# Allegro board AHC-19-001_Relay_PCB.brd
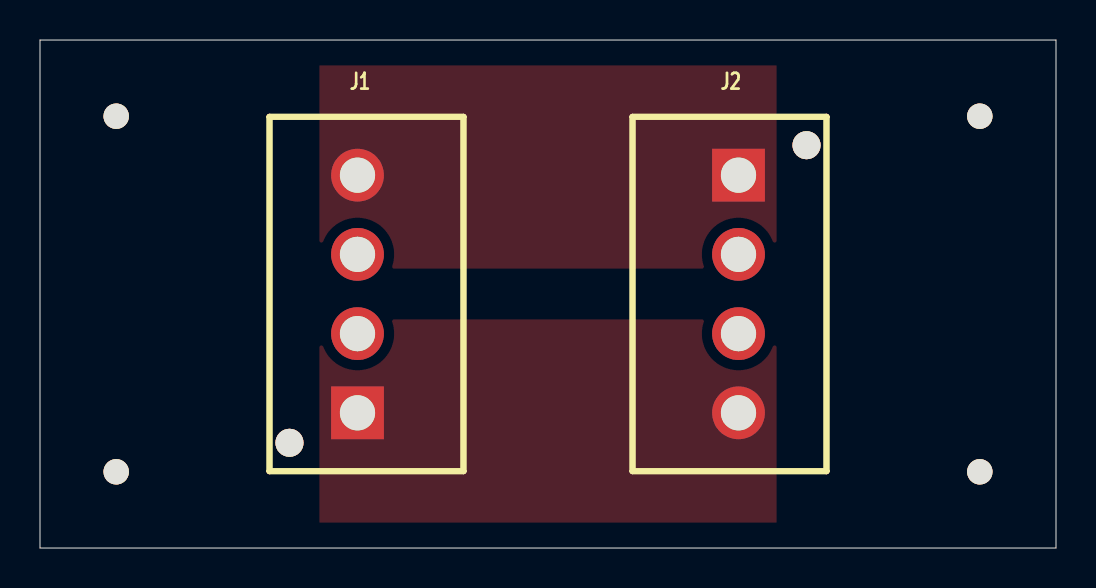
[diagram p0: board, top side]
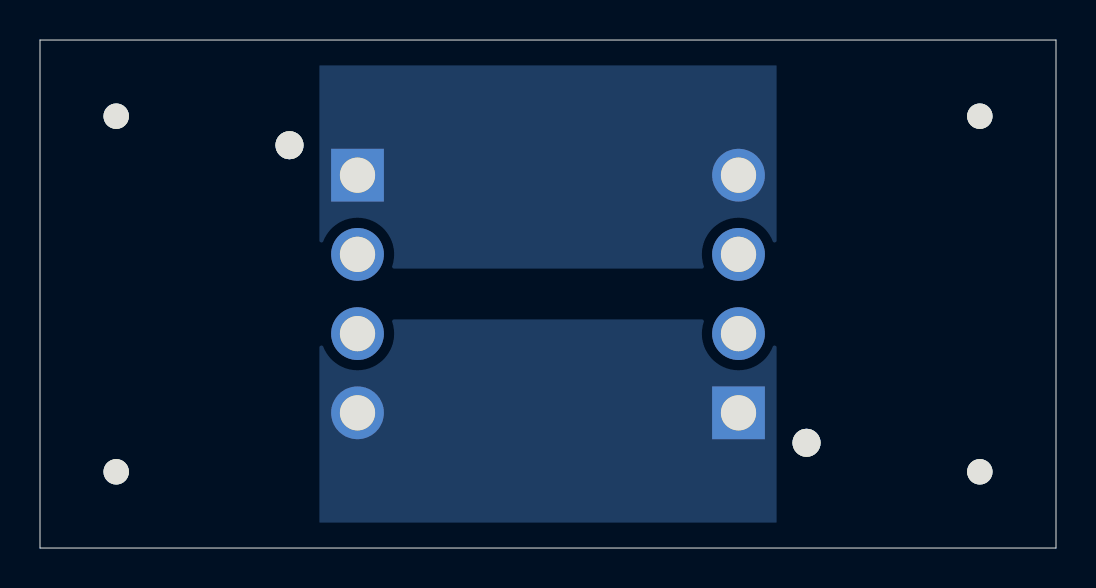
[diagram p1: board, bottom side, seen from below]

Outline 50.8 x 25.4 mm; copper layers: TOP, BOTTOM. Coordinates in mm from the lower left corner of the outline.
Outline path: 0,25.4 0,0 50.8,0 50.8,25.4 0,25.4

## Design rules (mm)
constraint set DEFAULT: min track width 0.152, pair gap 0.152

## Placement (name value [footprint] x y rotation side)
J1  B4P-VH-FB-B  [JST_B4P-VH-FB-B]  16.32 12.7 90 top
J2  B4P-VH-FB-B  [JST_B4P-VH-FB-B]  34.48 12.7 270 top
NOREF  -  []  3.81 3.81 90 top
NOREF#2  -  []  15.87 6.76 0 top
NOREF#3  -  [unnamed#2]  3.81 3.81 0 top
NOREF#4  -  []  -50.8 -127 0 top
NOREF#5  -  [unnamed#2]  3.81 21.59 0 top
NOREF#6  -  []  50.8 0 90 top
NOREF#7  -  [unnamed#2]  46.99 3.81 0 top
NOREF#8  -  [unnamed#2]  46.99 21.59 0 top
NOREF#9  -  []  0 25.4 0 top
NOREF#10  -  []  3.81 21.59 0 top

## Library data of the parts
J1 J2 = CON_4

## Footprints (pads in the part's own frame, mm; a bottom-side part is the same pattern mirrored in y, then rotated)
JST_B4P-VH-FB-B
  round 1.4 hole 1.4: (-7.44,3.851)
  rect 2.639x2.639 hole 1.76: 1(-5.941,0.45)
  round 2.639 hole 1.76: 2(-1.981,0.45) 3(1.981,0.45) 4(5.941,0.45)
unnamed#2
  round 1.27 hole 3.962 unplated: (0,0)

## Nets
N00654: J1.4 J2.1
N00658: J1.1 J2.4

Pads without a net: J1 2 3; J2 2 3

## Copper pours and planes (outline as drawn; the poured copper is in the pictures)
N00654 on TOP, BOTTOM: 13.97,13.97 36.83,13.97 36.83,24.13 13.97,24.13
N00658 on TOP: 13.97,11.43 36.83,11.43 36.83,1.27 13.97,1.27
N00658 on BOTTOM: 13.97,1.27 36.83,1.27 36.83,11.43 13.97,11.43

## Text on the board
XSECTION_CHART: STACKUP TABLE | Unit = Mils | # | 1 | 2 | NAME | TOP | BOTTOM | TYPE | SURFACE | CONDUCTOR | DIELECTRIC | MATERIAL | AIR | COPPER | FR-4 | TOTAL THICKNESS | THICKNESS | 0 | 1.7 | 58 | 61.4
User.5: FABRICATION NOTES (UNLESS OTHERWISE SPECIFIED): | 1. TOP SIDE SHOWN. | 2. BUILD IN ACCORDANCE WITH ALL IPC STANDARDS RELEVANT TO PRINTED | CIRCUIT BOARD FABRICATION. | 3. DIELECTRIC MATERIAL SHALL MEET THE REQUIREMENTS TYPE 370HR PER STACKUP | DETAIL OR EQUIVALENT AND SATISFY ANY IMPEDANCE REQUIREMENTS. | 4. DRILL HOLE, SLOT, AND CUTOUT DIMENSIONS ARE SHOWN AFTER PLATING. | 5. SILKSCREEN BOTH SIDES USING EPOXY OR ACRYLIC BASED WHITE NON-CONDUCTIVE | SILKSCREEN. SILKSCREEN TO BE REMOVED FROM ANY CONDUCTIVE SURFACE. | 6. ETCH VENDOR ID, UL DESIGNATION, AND DATECODE ON THE BACKSIDE. | 7. SOLDER MASK BOTH SIDES GREEN. NO SOLDERMASK ON COMPONENT PINS. | 8. IMPEDANCE REQUIREMENTS ARE AS FOLLOWS. +/- 10%. | IF PRESENT, ALL OUTER 6.25 MIL WIDE TRACES 50 OHM SINGLE ENDED. | IF PRESENT, ALL INNER 5.25 MIL WIDE TRACES 50 OHM SINGLE ENDED. | TRACE WIDTHS SHALL NOT BE MODIFIED WITHOUT APPROVAL. | 9. NO CHANGES WILL BE ALLOWED TO DESIGN WITHOUT SPECIFIC APPROVAL. | 10. ALL MATERIALS ARE TO BE ROHS AND WEEE COMPLIANT. | 11. LAYER STACKUP INFORMATION INCLUDED IN THIS DRAWING SHOWS OUTER LAYER | THICKNESS AFTER PLATING AND SUPERSEDES ANY OTHER DESIGN DOCUMENTATION. | 12. ELECTRICALLY DISCONNECTED COPPER THIEVING IS ACCEPTABLE TO HELP MAINTAIN | COPPER PLATING DISTRIBUTION IN LOW PRESSURE AREAS TO AVOID DELAMINATION. | 13. <DO NOT> PROVIDE BOARDS IN ARRAY FORMAT. ARRAYS SHOULD HAVE MINIMUM OF | 250 MILS ON ALL SIDES.
User.6: ASSEMBLY TOP NOTES (UNLESS OTHERWISE SPECIFIED): | 1. ASSEMBLE AND INSPECT IN ACCORDANCE WITH ALL IPC STANDARDS RELEVANT | TO PRINTED CIRCUIT BOARD ASSEMBLY. | 2. ALL MATERIALS ARE TO BE ROHS AND WEEE COMPLIANT. | 3. IF BARE BOARDS ARE SUPPLIED THEY WILL BE AN <ARRAY OR INDIVIDUAL PEICES>. | 4. ONLY PARTS CONTAINED IN BILL OF MATERIALS SHALL USED FOR TURN-KEY | ASSEMBLY UNLESS EQUIVALENT PART IS APPROVE. | 5. REMOVE ANY KAPTON TAPE COVERING COMPONENTS. | 6. "DNI" REFERENCE IN BILL OF MATERIALS MEANS DO NOT INSTALL ON PCB. | 7. RETURN ANY UNASSEMBLED OR EXTRA COMPONENTS WITH ASSEMBLED PCBS. | 8. REFLOW HEAT PROFILE ARE REQUIRED TO PROPERLY ATTACH COMPONENTS. | 9. HIDDEN PINS ON BGA OR CSP PACKAGES ARE REQUIRED TO BE X-RAY'ED FOR | PROPER SOLDER ATTACH. | 10. REMOVE ARRAY MOUSE BITES ON EDGE OF FINISHED PCB WITH PLUNGE ROUTER. | 11. SOLDERMASK BARREL RELIEF TO AVOID ASSEMBLY ISSUES ON LARGE SURFACE | MOUNT PADS IS ACCEPTABLE. | 13. ASSEMBLY VARIATIONS EXIST IN THIS DESIGN AND A BILL OF MATERIALS FOR | EACH VARIANT IS PROVIDED.
User.13: FIGURE | FINISHED_SIZE | 55.1 | 69.3 | 156.0 | DRILL CHART: TOP to BOTTOM | ALL UNITS ARE IN MILS | PLATED | NON-PLATED | QTY | 2 | 8 | 4
